# Allegro board MPU6050_STM8.brd
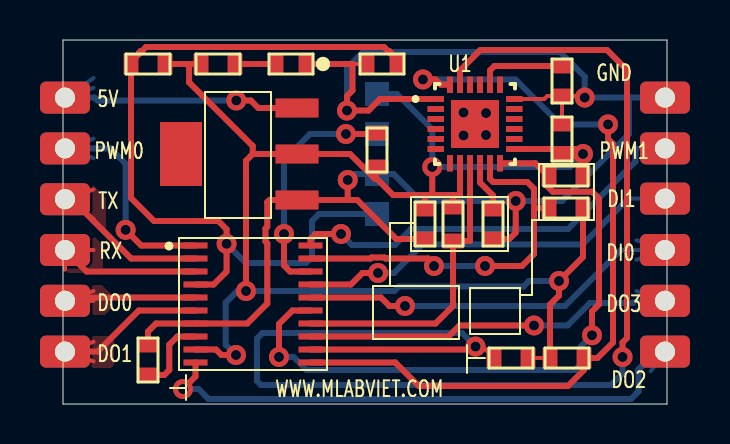
[diagram p0: board, top side]
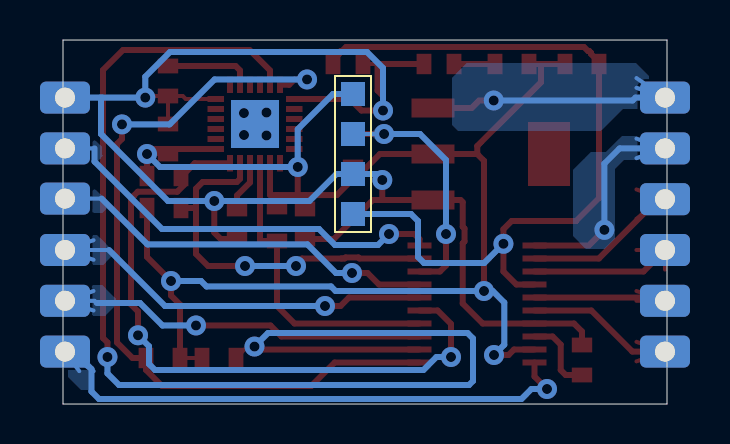
[diagram p1: board, bottom side, seen from below]

Outline 30.2 x 18.2 mm; copper layers: TOP, BOTTOM. Coordinates in mm from the lower left corner of the outline.
Outline path: 0,18.2 30.2,18.2 30.2,0 0,0 0,18.2

## Design rules (mm)
constraint set DEFAULT: 

## Placement (name value [footprint] x y rotation side)
C1  10nF  [CAP_SMD_0603]  15.95 17 180 top
C7  1uF  [CAP_SMD_0603]  4.25 2.2 90 top
C8  4V 0.1uF  [CAP_SMD_0603]  24.95 13.25 90 top
C9  2V 0.1uF  [CAP_SMD_0603]  21.5 9 270 top
C10  4V 10nF  [CAP_SMD_0603]  18.1 9 270 top
C11  50V 2.2nF  [CAP_SMD_0603]  24.95 16.15 90 top
J2  SWIM  [SWIM_SMD]  15.7 15.5 270 bottom
LD1  LED  [LED_SMD_0603]  11.4 17 180 top
P1  PAD  [PAD_CUSTOM]  0.1 15.32 0 top
P2  PAD  [PAD_CUSTOM]  0.1 12.78 0 top
P3  PAD  [PAD_CUSTOM]  0.1 10.24 0 top
P4  PAD  [PAD_CUSTOM]  0.1 7.7 0 top
P5  PAD  [PAD_CUSTOM]  0.1 5.16 0 top
P6  PAD  [PAD_CUSTOM]  0.1 2.62 0 top
P7  PAD  [PAD_CUSTOM]  30.1 2.62 0 top
P8  PAD  [PAD_CUSTOM]  30.1 5.16 0 top
P9  PAD  [PAD_CUSTOM]  30.1 7.7 0 top
P10  PAD  [PAD_CUSTOM]  30.1 10.27 0 top
P11  PAD  [PAD_CUSTOM]  30.1 12.78 0 top
P12  PAD  [PAD_CUSTOM]  30.1 15.32 0 top
R1  10k  [RES_SMD_0603]  4.25 17 180 top
R17  1K  [RES_SMD_0603]  15.7 12.7 90 top
R18  4.7K  [RES_SMD_0603]  22.4 2.3 180 top
R19  4.7K  [RES_SMD_0603]  25.2 2.3 0 top
R20  10k  [RES_SMD_0603]  25.15 11.4 0 top
R21  10k  [RES_SMD_0603]  25.15 9.8 0 top
R22  330R  [RES_SMD_0603]  7.75 17 0 top
R23  10k  [RES_SMD_0603]  19.5 9 90 top
U1  MPU6050  [QFN_24PIN_4_4_09]  20.6 14 0 top
U3  AMS1117  [SOT223]  8.8 12.4 90 top
U5  stm8s003f3p6-TSSOP20  [TSSOP20]  9.5 5 270 top

## Library data of the parts
C1 = CAP NP
C7 = CAP_0
C8-C11 = CAPACITOR NON-POL
J2 = CON4
LD1 = LED
P1-P12 = PAD
R1 R17-R23 = R
U1 = MPU6050
U3 = ASM1117
U5 = stm8s003f3p6-TSSOP20

## Footprints (pads in the part's own frame, mm; a bottom-side part is the same pattern mirrored in y, then rotated)
CAP_SMD_0603
  rect 0.74x1.02 smd: 1(-0.75,0) 2(0.75,0)
LED_SMD_0603
  rect 0.74x1.02 smd: 1(-0.75,0) 2(0.75,0)
PAD_CUSTOM
  rrect 2.5x1.6 hole 1: 1(0,0)
QFN_24PIN_4_4_09
  rect 0.825x0.3 smd: 1(-1.962,1.25) 2(-1.962,0.75) 3(-1.962,0.25) 4(-1.962,-0.25) 5(-1.962,-0.75) 6(-1.962,-1.25) 13(1.962,-1.25) 14(1.962,-0.75) 15(1.962,-0.25) 16(1.962,0.25) 17(1.962,0.75) 18(1.962,1.25)
  rect 0.3x0.825 smd: 7(-1.25,-1.962) 8(-0.75,-1.962) 9(-0.25,-1.962) 10(0.25,-1.962) 11(0.75,-1.962) 12(1.25,-1.962) 19(1.25,1.962) 20(0.75,1.962) 21(0.25,1.962) 22(-0.25,1.962) 23(-0.75,1.962) 24(-1.25,1.962)
RES_SMD_0603
  rect 0.74x1.02 smd: 1(-0.85,0) 2(0.85,0)
SOT223
  rect 0.95x2.15 smd: 1(-2.201,-2.901) 2(0.099,-2.901) 3(2.399,-2.901)
SWIM_SMD
  rect 1.2x1.2 smd: 1(0,0) 2(2,0) 3(4,0) 4(6,0)
TSSOP20
  rect 0.3x1.2 smd: 1(-2.925,-2.875) 2(-2.275,-2.875) 3(-1.625,-2.875) 4(-0.975,-2.875) 5(-0.325,-2.875) 6(0.325,-2.875) 7(0.975,-2.875) 8(1.625,-2.875) 9(2.275,-2.875) 10(2.925,-2.875) 11(2.925,2.875) 12(2.275,2.875) 13(1.625,2.875) 14(0.975,2.875) 15(0.325,2.875) 16(-0.325,2.875) 17(-0.975,2.875) 18(-1.625,2.875) 19(-2.275,2.875) 20(-2.925,2.875)

## Nets
3V3: C8.1 C10.1 J2.1 R1.1 R17.1 R18.1 R19.1 R20.2 R21.2 R22.1 R23.2 U1.8(VLOGIC) U1.13 U3.2(VOUT) U5.9
5V: P1.1 U3.3
GND: C1.2 C7.2 C8.2 C9.2 C10.2 C11.1 J2.3 LD1.1(CATHODE) P12.1 U1.1 U1.18 U3.1 U5.7
AD0: R23.1 U1.9 U5.14
DI0: P9.1 U5.16
DI1: P10.1 U5.17
DO0: P5.1 U5.5
DO1: P6.1 U5.6
DO2: P7.1 U5.10([SPI_NSS]TIM2_CH3[HS]/PA3)
DO3: P8.1 U5.13
FSYNC: R21.1 U1.11 U5.19
MPU_INT: R20.1 U1.12 U5.15
PWM0: P2.1 U5.1
PWM1: P11.1 U5.20
RESET: C1.1 J2.4 R1.2 U5.4
RX: P4.1 U5.3
SCL: R18.2 U1.23 U5.12
SDA: R19.2 U1.24 U5.11
SWIM: J2.2 R17.2 U5.18
TX: P3.1 U5.2
N71205: C7.1 U5.8
N71773: C9.1 U1.10
N72233: C11.2 U1.20
N727251: LD1.2 R22.2

Pads without a net: U1 2 3 4 5 6 7 14 15 16 17 19 21 22

## Via types
v1: diameter 1, hole 0.5, TOP to BOTTOM, 31 vias

## Routing (per net, layer and track width the routed paths; a pad name or vN(x,y) marks a point on that pad's centre or on a via; arc(x,y) is an arc through that point)
3V3: length 81
  TOP w0.2: C8.1 v1(26,12.5) ; 15.7,11.25 R17.1 ; R19.1 R18.1
  TOP w0.3: 9.49,12.5 U3.2 14.35,12.5 15.6,11.25 15.7,11.25 16.51,10.45 18.1,10.45 ; 9.49,12.5 9.15,12.16 v1(9.15,5.65) ; 9.49,12.5 9.49,12.9 6.3,16.08 6.3,17 ; R21.2 26,7.35 v1(24.8,6.15) 24.8,5.42 24.35,4.97 R19.1 ; U5.9 7.65,2.73 7.92,2.45 v1(8.65,2.45) ; 19.5,10.45 19.85,10.45 U1.8 ; 19.5,10.45 R23.2 ; 19.5,10.45 18.46,10.45 ; R1.1 6.3,17 ; 6.3,17 R22.1 ; C10.1 18.1,10.45 ; 18.1,10.45 18.46,10.45 ; v1(18.46,11.85) 18.46,10.45 ; R20.2 v1(26,12.5) 25.75,12.75 U1.13
  BOTTOM w0.3: J2.1 16.7,15.5 18.46,13.74 v1(18.46,11.85) 25.35,11.85 v1(26,12.5) ; v1(24.8,6.15) 23.3,6.15 23.03,5.88 16.8,5.88 16.57,5.65 v1(9.15,5.65) 8.71,5.65 8.14,5.07 8.14,2.96 v1(8.65,2.45)
5V: length 15.1
  TOP w0.3: v1(8.66,15.17) 9.39,15.17 9.77,14.8 U3.3
  BOTTOM w0.2: 1.53,16.3 P1.1 1.53,15.81
  BOTTOM w0.3: v1(8.66,15.17) 1.72,15.17 1.58,15.32 P1.1
GND: length 78
  TOP w0.2: C11.1 24.21,15.4 24.06,15.25 U1.18 ; C11.1 C8.2 ; C11.1 26.01,15.4 v1(26.09,15.32) ; 14.47,17 C1.2
  TOP w0.3: C10.2 16.66,8.25 14.71,10.2 14.24,10.2 ; 14.24,10.2 U3.1 10.32,10.2 10.21,10.09 10.21,8.86 10.12,8.77 10.12,8.13 10.21,8.04 10.21,5.03 9.21,4.03 U5.7 4.65,4.03 4.25,3.62 C7.2 ; 14.24,10.2 v1(14.24,11.2) ; U1.1 15.85,15.25 15.28,14.67 v1(14.2,14.67) 14.2,15.4 14.47,15.67 14.47,17 LD1.1 ; C9.2 22.31,8.25 22.64,8.57 v1(22.64,10.15)
  BOTTOM w0.3: P12.1 28.36,15.32 28.3,15.26 ; 28.3,15.26 28.3,13.5 24.95,10.15 v1(22.64,10.15) 17.88,10.15 16.53,11.5 J2.3 14.54,11.5 v1(14.24,11.2) ; 28.3,15.26 28.24,15.32 v1(26.09,15.32) 26.09,16.36 24.85,17.6 15,17.6 14.2,16.8 v1(14.2,14.67)
AD0: length 15.5
  TOP w0.3: U1.9 20.35,8.19 20.31,8.15 R23.1 19.5,4.9 18.62,4.03 U5.14
DI0: length 22.1
  TOP w0.3: U5.16 15.9,5.33 16.32,4.9 v1(17.1,4.9)
  BOTTOM w0.2: 28.67,8.19 P9.1 ; P9.1 28.67,7.21 ; P9.1 27.9,7.7
  BOTTOM w0.3: 27.9,7.7 25.1,4.9 v1(17.1,4.9)
DI1: length 19.5
  TOP w0.3: U5.17 14.4,5.97 14.97,6.55 v1(15.75,6.55)
  BOTTOM w0.2: P10.1 28.27,10.27
  BOTTOM w0.3: v1(15.75,6.55) 16.55,6.55 17.98,7.98 25.98,7.98 28.27,10.27
DO0: length 9.5
  TOP w0.2: 1.53,5.65 P5.1 1.53,5.16
  TOP w0.3: P5.1 0.26,5.33 U5.5
DO1: length 10.4
  TOP w0.2: 1.53,2.13 P6.1 1.53,3.11
  TOP w0.3: P6.1 1.73,2.62 3.79,4.68 6.62,4.68
DO2: length 30.5
  TOP w0.3: v1(6,0.75) 6.62,1.38 U5.10
  BOTTOM w0.2: 29.65,2.62 P7.1 ; P7.1 29.39,1.64 ; P7.1 28.67,1.64
  BOTTOM w0.3: 29.65,2.62 28.78,1.75 28.78,0.63 28.4,0.25 7.28,0.25 6.78,0.75 v1(6,0.75)
DO3: length 21.5
  TOP w0.3: U5.13 19.28,3.38 19.83,3.93 v1(23.55,3.93)
  BOTTOM w0.2: P8.1 28.62,5.16 28.51,5.05 ; P8.1 28.67,5.65 ; P8.1 28.67,4.67
  BOTTOM w0.3: v1(23.55,3.93) 25.23,3.93 26.35,5.05 28.51,5.05
FSYNC: length 18.9
  TOP w0.3: v1(21.1,6.9) 22.95,6.9 23.55,7.5 23.55,9.8 ; 23.55,9.8 R21.1 ; 23.55,9.8 23.55,10.77 23.22,11.1 21.51,11.1 21.35,11.26 U1.11 ; v1(18.55,6.9) 18.55,6.98 18.25,7.28 16.27,7.28 16.27,7.28 16.12,7.28 16.07,7.33 15.43,7.33 15.38,7.28 12.38,7.28
  BOTTOM w0.3: v1(21.1,6.9) v1(18.55,6.9)
MPU_INT: length 33.9
  TOP w0.2: 24.15,11.25 R20.1
  TOP w0.3: 12.38,4.68 11.47,4.68 10.8,4 v1(10.8,2.35) ; v1(26.45,3.44) 26.45,4.63 26.8,4.98 26.8,10.26 26.65,10.41 26.65,10.42 26.46,10.61 24.49,10.61 24.15,10.95 24.15,11.5 23.61,12.04 U1.12
  BOTTOM w0.3: v1(26.45,3.44) 25.9,2.89 25.9,2 25.6,1.7 12.18,1.7 11.53,2.35 v1(10.8,2.35)
Net_1:
  vias: v1(20.03,14.57) v1(20.03,13.43) v1(21.15,13.45) v1(21.15,14.55)
PWM0: length 13.5
  TOP w0.3: v1(3.13,8.71) 3.91,7.92 U5.1
  BOTTOM w0.2: 1.53,13.27 P2.1 1.53,12.29
  BOTTOM w0.3: P2.1 2.37,12.78 3.13,12.02 v1(3.13,8.71)
PWM1: length 20.8
  TOP w0.3: v1(13.9,8.5) 12.63,8.5 12.38,8.25 U5.20
  BOTTOM w0.2: P11.1 28.62,12.78
  BOTTOM w0.3: v1(13.9,8.5) 14.45,7.95 16.6,7.95 17.4,8.75 25.25,8.75 28.62,12.12 28.62,12.78
RESET: length 40.3
  TOP w0.3: 6.62,5.97 7.53,5.97 8.18,6.62 v1(8.18,8.01) 8.18,8.74 7.77,9.15 4.55,9.15 3.4,10.3 R1.2 3.4,17.1 3.8,17.5 3.8,17.56 3.89,17.65 3.95,17.65 4.15,17.85 16.05,17.85 16.25,17.65 16.31,17.65 16.4,17.56 16.4,17.5 16.7,17.2 C1.1
  BOTTOM w0.3: J2.4 12.8,9.5 12.45,9.15 12.45,7.35 12.15,7.05 9.14,7.05 v1(8.18,8.01)
RX: length 9.4
  TOP w0.2: 0.1,6.72 P4.1 1.53,7.7
  TOP w0.3: U5.3 1.17,6.62 P4.1
SCL: length 66.7
  TOP w0.2: v1(20.63,2.87) 20.98,2.87 R18.2
  TOP w0.3: v1(27.98,2.35) 27.98,3.08 28.2,3.3 28.2,16.7 27.2,17.7 20.87,17.7 19.85,16.68 U1.23 ; v1(20.63,2.87) 20.48,2.73 U5.12
  BOTTOM w0.3: v1(27.98,2.35) 27.98,1.53 27.4,0.95 9.9,0.95 9.7,1.15 9.7,3.28 9.97,3.55 19.95,3.55 v1(20.63,2.87)
SDA: length 39.5
  TOP w0.3: U1.24 18.89,15.96 18.63,16.23 v1(18,16.23) ; U5.11 16.61,2.08 17.79,0.9 25.25,0.9 26.05,1.7 R19.2 26.72,2.3 27.5,3.08 27.5,13 27.25,13.25 v1(27.25,13.98)
  BOTTOM w0.3: v1(27.25,13.98) 24.87,13.98 22.62,16.23 v1(18,16.23)
SWIM: length 13.5
  TOP w0.3: v1(14.15,13.5) 15.51,13.5 15.56,13.55 R17.2 ; U5.18 11.35,6.62 11.05,6.92 v1(11.05,8.5)
  BOTTOM w0.2: v1(14.15,13.5) J2.2
  BOTTOM w0.3: v1(11.05,8.5) 11.05,12.2 12.35,13.5 v1(14.15,13.5)
TX: length 11
  TOP w0.2: 1.53,10.73 P3.1 1.53,9.26
  TOP w0.3: 6.62,7.28 3.4,7.28 0.44,10.24 P3.1
N71205: length 3.9
  TOP w0.3: C7.1 5.06,1.45 5.31,1.7 5.31,2.97 5.72,3.38 U5.8
N71773: length 2.6
  TOP w0.3: U1.10 20.85,11.07 21.5,10.42 C9.1
N72233: length 4.4
  TOP w0.3: U1.20 21.35,16.68 21.57,16.9 C11.2
N727251: length 2
  TOP w0.3: LD1.2 R22.2

## Copper pours and planes (outline as drawn; the poured copper is in the pictures)
5V on BOTTOM: 0.9,14.8 0.9,16.4 1.55,17.05 10,17.05 10.75,16.3 10.75,13.95 10.45,13.65 3.3,13.65 2.2,14.75 0.95,14.75
DI0 on BOTTOM: 29.3,8.45 28.5,8.45 27.75,7.7 27.75,7.4 28.2,6.95 29.05,6.95 29.3,7.2
DI1 on BOTTOM: 29.2,11.05 28.9,11.05 27.95,10.1 27.95,9.85 28.25,9.55 29.15,9.55 29.2,9.6
DO0 on TOP: 0.9,5.95 1.95,5.95 2.4,5.5 2.4,4.75 2.1,4.45 1.05,4.45 0.9,4.6
DO1 on TOP: 0.85,3.4 2.4,3.4 2.45,3.45 2.55,3.35 2.55,1.95 2.4,1.8 0.8,1.8 0.8,3.35
DO2 on BOTTOM: 29.75,3.3 28.9,3.3 28.65,3.05 28.65,0.95 28.9,0.7 29.3,0.7 29.95,1.35 29.95,3.1
DO3 on BOTTOM: 29.3,5.95 28.25,5.95 27.55,5.25 27.55,4.95 28.1,4.4 29.4,4.4 29.4,5.8 29.3,5.9
Net_1 on TOP (solid shape): 21.8,12.8 19.4,12.8 19.4,15.2 21.8,15.2
Net_1 on BOTTOM (solid shape): 21.8,12.8 19.4,12.8 19.4,15.2 21.8,15.2
Net_2 on TOP (solid shape): 6.95,10.9 4.85,10.9 4.85,14.1 6.95,14.1
PWM0 on BOTTOM: 0.9,13.4 2.25,13.4 3.05,12.6 3.8,12.6 4.7,11.7 4.7,8.4 4.05,7.75 3.1,7.75 2.6,8.25 2.6,11.75 2.15,12.2 0.9,12.2 0.8,12.3 0.8,13.3
PWM1 on BOTTOM: 29.1,13.45 28.85,13.45 28.25,12.85 28.25,12.45 28.2,12.4 28.5,12.1 29.1,12.1 29.35,12.35 29.35,13.25 29.1,13.5
RX on TOP: 0.1,7.65 0.1,6.7 0.25,6.55 1.9,6.55 2,6.65 2,7.95 1.5,8.45 0.9,8.45
TX on TOP: 0.9,10.95 1.5,10.95 2.15,10.3 2.15,8.65 1.9,8.65 0.9,9.65

Small or netless copper shapes (teardrops, artwork), in the pictures only: 1 on TOP, 1 on BOTTOM

## Text on the board
Ref Des/Silkscreen Top: PWM0 | 5V | DO0 | DO1 | TX | RX | WWW.MLABVIET.COM | GND | PWM1 | DI0 | DO3 | DI1 | DO2
